# Altium PCB GY-521封装图.PcbDoc
Units mm, origin at the board's own origin, x right, y up, seen from the top; angles counter-clockwise.
Board outline 20.32 x 15.57 mm, 2 copper layers (Top Layer, Bottom Layer); 15 components, 0 nets, 63 pads, 0 vias.
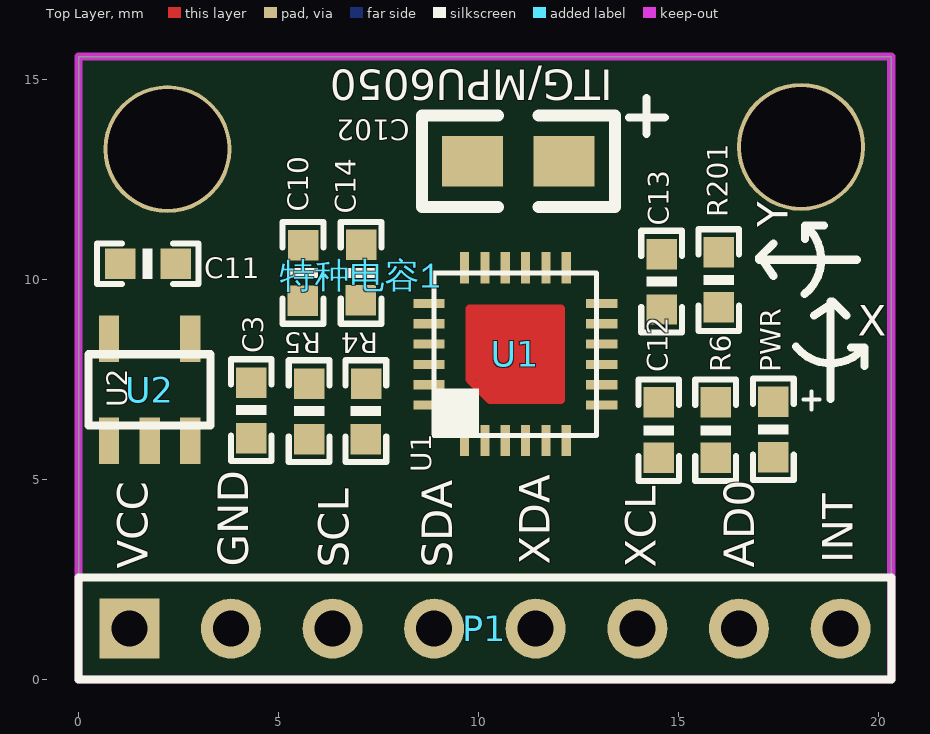
[diagram p0: Top Layer view]
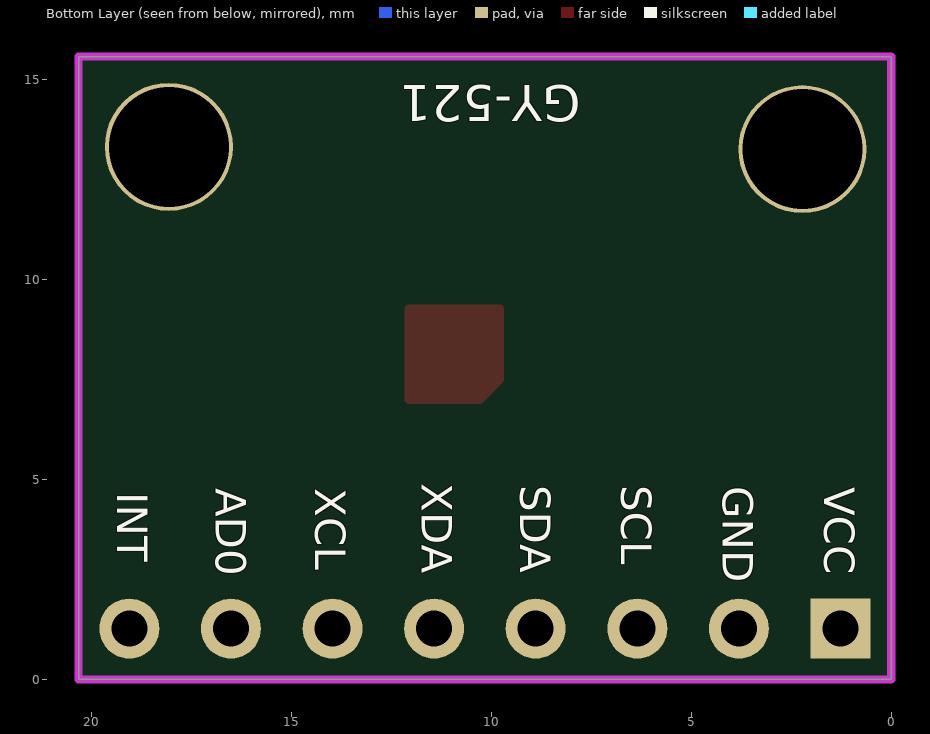
[diagram p1: Bottom Layer view, seen from below]

## Layer stack, top to bottom
Top Layer: signal copper 0.0356
Dielectric: dielectric 0.32, FR-4, Dk 4.8
Bottom Layer: signal copper 0.0356

## Board outline
0,15.57 20.32,15.57 20.32,0 0,0 0,15.57

## Design rules (kind name [scope] priority, off if disabled: settings)
Clearance [All] p1: gap=0.254
FabricationTestPointUsage TestPointUsage [All] p1: valid=0 allowmultiple=FALSE
FabricationTestpoint Testpoint [All] p1: side=3 testpointundercomponent=TRUE minsize=1.016 maxsize=2.54 preferedsize=1.524 minholesize=0 maxholesize=1.016 preferedholesize=0.813 testpointgrid=0.025 allowsidetop=TRUE allowsidebottom=TRUE usegrid=TRUE gridtolerance=0
PolygonConnect [All] p1: connectstyle=Relief reliefconductorwidth=0.254 reliefentries=4 polygonreliefangle="90 Angle"
RoutingVias [All] p1: holewidth=0.711 width=1.27 viastyle="Through Hole" minholewidth=0.711 minwidth=1.27 maxholewidth=0.711 maxwidth=1.27
SilkscreenOverComponentPads [All] p1: minsilkscreentomaskgap=0.254
SolderMaskExpansion [All] p1: expansion=0.102
Width [All] p1: maxlimit=0.254 minlimit=0.254 preferedwidth=0.254
25 further rules are at their usual default settings.

## Components (designator, comment, footprint, x,y, rotation, side; value= is the part's Value field where it differs from the comment)
C3 "4.7uF" 0603P 4.32,6.731 r270 top
C10 "10nF" 0603P 5.613,10.16 r270 top
C11 "0.01uF" 0603P 1.727,10.389 r0 top
C12 "0.1uF" 0603P 14.503,6.223 r90 top
C13 "0.1uF" 0603P 14.578,9.944 r270 top
C102 "0.1uF" 0805 9.855,12.954 r0 top
P1 "NET" HDR1X8 1.27,1.27 r0 top
PWR "D1" 0603P 17.374,6.248 r270 top (schematic designator PWR?)
R4 "4.7K" 0603P 7.188,6.706 r270 top
R5 "4.7K" 0603P 5.766,6.706 r270 top
R6 "4.7K" 0603P 15.926,6.223 r90 top
R201 "1K" 0603P 16.002,9.982 r90 top
U1 "MPU-6050" MPU-6050 12.954,6.096 r90 top
U2 "3.3V" 3.3v 0.254,6.35 r0 top
特种电容1 "2200pF" 0603P 7.061,10.16 r90 top

## Footprints (in the part's own frame and the unit in brackets; to place one, negate y for a bottom-side part, rotate by r counter-clockwise, add the part's x,y. Pads: shape width x height; smd on the part's side, far side on the other; paste and mask are expansions set on the pad)
3.3v [mil]
  rect 20.01x45.75 smd: 1(20,-15) 2(60,-15) 3(100,-15) 4(100,85) 5(20,85)
  silkscreen extent 0,0 120,70
0603P [mil]
  rect 30x30 smd: 1(-27,0) 2(27.5,-0.06)
  silkscreen extent -50,-20 50,20
0805 [mil]
  rect 60x50 smd: 1(0,-0.06) 2(90,-0.06)
  silkscreen extent -50,-45 140,45
HDR1X8 [mm]
  rect 1.5x1.5 hole 0.9: 1(0,0)
  round 1.5 hole 0.9: 2(2.54,0) 3(5.08,0) 4(7.62,0) 5(10.16,0) 6(12.7,0) 7(15.24,0) 8(17.78,0)
  silkscreen extent -1.27,-1.27 19.05,1.27
MPU-6050 [mil]
  rect 30.75x9.01 smd: 1(-5,130) 2(-5,110) 3(-5,90) 4(-5,70) 5(-5,50) 6(-5,30) 13(165,30) 14(165,50) 15(165,70) 16(165,90) 17(165,110) 18(165,130)
  rect 9.01x30.75 smd: 7(30,-5) 8(50,-5) 9(70,-5) 10(90,-5) 11(110,-5) 12(130,-5) 19(130,165) 20(110,165) 21(90,165) 22(70,165) 23(50,165) 24(30,165)
  Top Layer region: 45,100 60,100 60,115 45,115
  Top Layer region: 55,95 125,95 125,125 55,125
  Top Layer region: 35,35 125,35 125,105 35,105
  Top Layer lines w8: 45,115 60,115 ; 42.26,107.26 40,105 35,105 ; 35,105 35,35 125,35 125,125 55,125 35,105
  silkscreen extent 0,0 160,160

## Part data
PWR: library part LED2

## Free pads (board coordinates)
  round 3.2 hole 3: 0(2.223,13.253) 1(18.063,13.313)

## Nets (pads, with @x,y where several pads share a name; then routed paths per layer and width w, separated by ;. In a path a pad name is that pad's centre, name@x,y a point inside that pad or via, vN(x,y) a via of type N, cw(c..) or ccw(c..) an arc to the next point about the centre after c; other vN are vias at no path point)
pads on no net: C3.1 C3.2 C10.1 C10.2 C11.1 C11.2 C12.1 C12.2 C13.1 C13.2 C102.1 C102.2 P1.1 P1.2 P1.3 P1.4 P1.5 P1.6 P1.7 P1.8 PWR.1 PWR.2 R4.1 R4.2 R5.1 R5.2 R6.1 R6.2 R201.1 R201.2 U1.1 U1.2 U1.3 U1.4 U1.5 U1.6 U1.7 U1.8 U1.9 U1.10 U1.11 U1.12 U1.13 U1.14 U1.15 U1.16 U1.17 U1.18 U1.19 U1.20 U1.21 U1.22 U1.23 U1.24 U2.1 U2.2 U2.3 U2.4 U2.5 特种电容1.1 特种电容1.2
copper on no net: | length 0.4
  Top Layer w0.254: 11.506,8.915 11.913,8.915

## Keep-outs
Keep-Out Layer:
  the board outline again, w0.203

## Silkscreen, mask and mechanical layers (free items; w line width, h text height)
Top Overlay:
  rectangle: 8.89,6.096 10.008,7.264
  lines w0.1: 18.13,6.99 18.53,6.99 ; 18.32,6.75 18.32,7.2
  lines w0.203: 13.767,14.046 14.656,14.046 ; 14.199,13.64 14.199,14.529 ; 17.374,10.084 17.094,10.49 ; 17.374,10.897 17.018,10.541 17.018,10.49 17.094,10.49 ; 17.937,8.316 ccw(c18.8,9.002) 19.651,8.3 ; 18.15,9.631 ccw(c17.465,10.494) 18.167,11.345 ; 18.167,11.004 18.167,11.345 ; 18.39,9.093 18.796,9.373 ; 18.635,11.345 18.167,11.345 ; 18.796,7.01 18.796,9.373 ; 19.202,9.093 18.847,9.449 18.796,9.449 18.796,9.373 ; 19.31,8.3 19.651,8.3 ; 19.456,10.49 17.094,10.49 ; 19.651,7.832 19.651,8.3
  text "ITG/MPU6050" at 13.36,15.24 h0.76 r180
  text "C14" at 6.934,11.633 h0.51 r90
  text "Y" at 17.729,11.303 h0.76 r90
  text "X" at 19.482,8.585 h0.76
  text "U2" at 1.219,6.807 h0.51 r90
  text "U1" at 8.814,5.182 h0.51 r90
  text "INT" at 19.355,2.896 h0.76 r90
  text "XDA" at 11.786,2.87 h0.76 r90
  text "GND" at 4.242,2.819 h0.76 r90
  text "SCL" at 6.756,2.794 h0.76 r90
  text "SDA" at 9.347,2.794 h0.76 r90
  text "XCL" at 14.427,2.794 h0.76 r90
  text "AD0" at 16.891,2.794 h0.76 r90
  text "VCC" at 1.727,2.769 h0.76 r90
Bottom Overlay:
  text "GY-521" at 7.76,14.85 h0.9 r180
  text "XDA" at 11.735,4.902 h0.76 r90
  text "SCL" at 6.756,4.851 h0.76 r90
  text "SDA" at 9.271,4.851 h0.76 r90
  text "GND" at 4.216,4.826 h0.76 r90
  text "VCC" at 1.676,4.801 h0.76 r90
  text "XCL" at 14.402,4.775 h0.76 r90
  text "AD0" at 16.891,4.775 h0.76 r90
  text "INT" at 19.355,4.674 h0.76 r90